# Altium PCB bala.PcbDoc
Units mil, origin at the board's own origin, x right, y up, seen from the top; angles counter-clockwise.
Board outline 3950 x 3150 mil, 2 copper layers (Top Layer, Bottom Layer); 18 components, 31 nets, 116 pads, 13 vias.
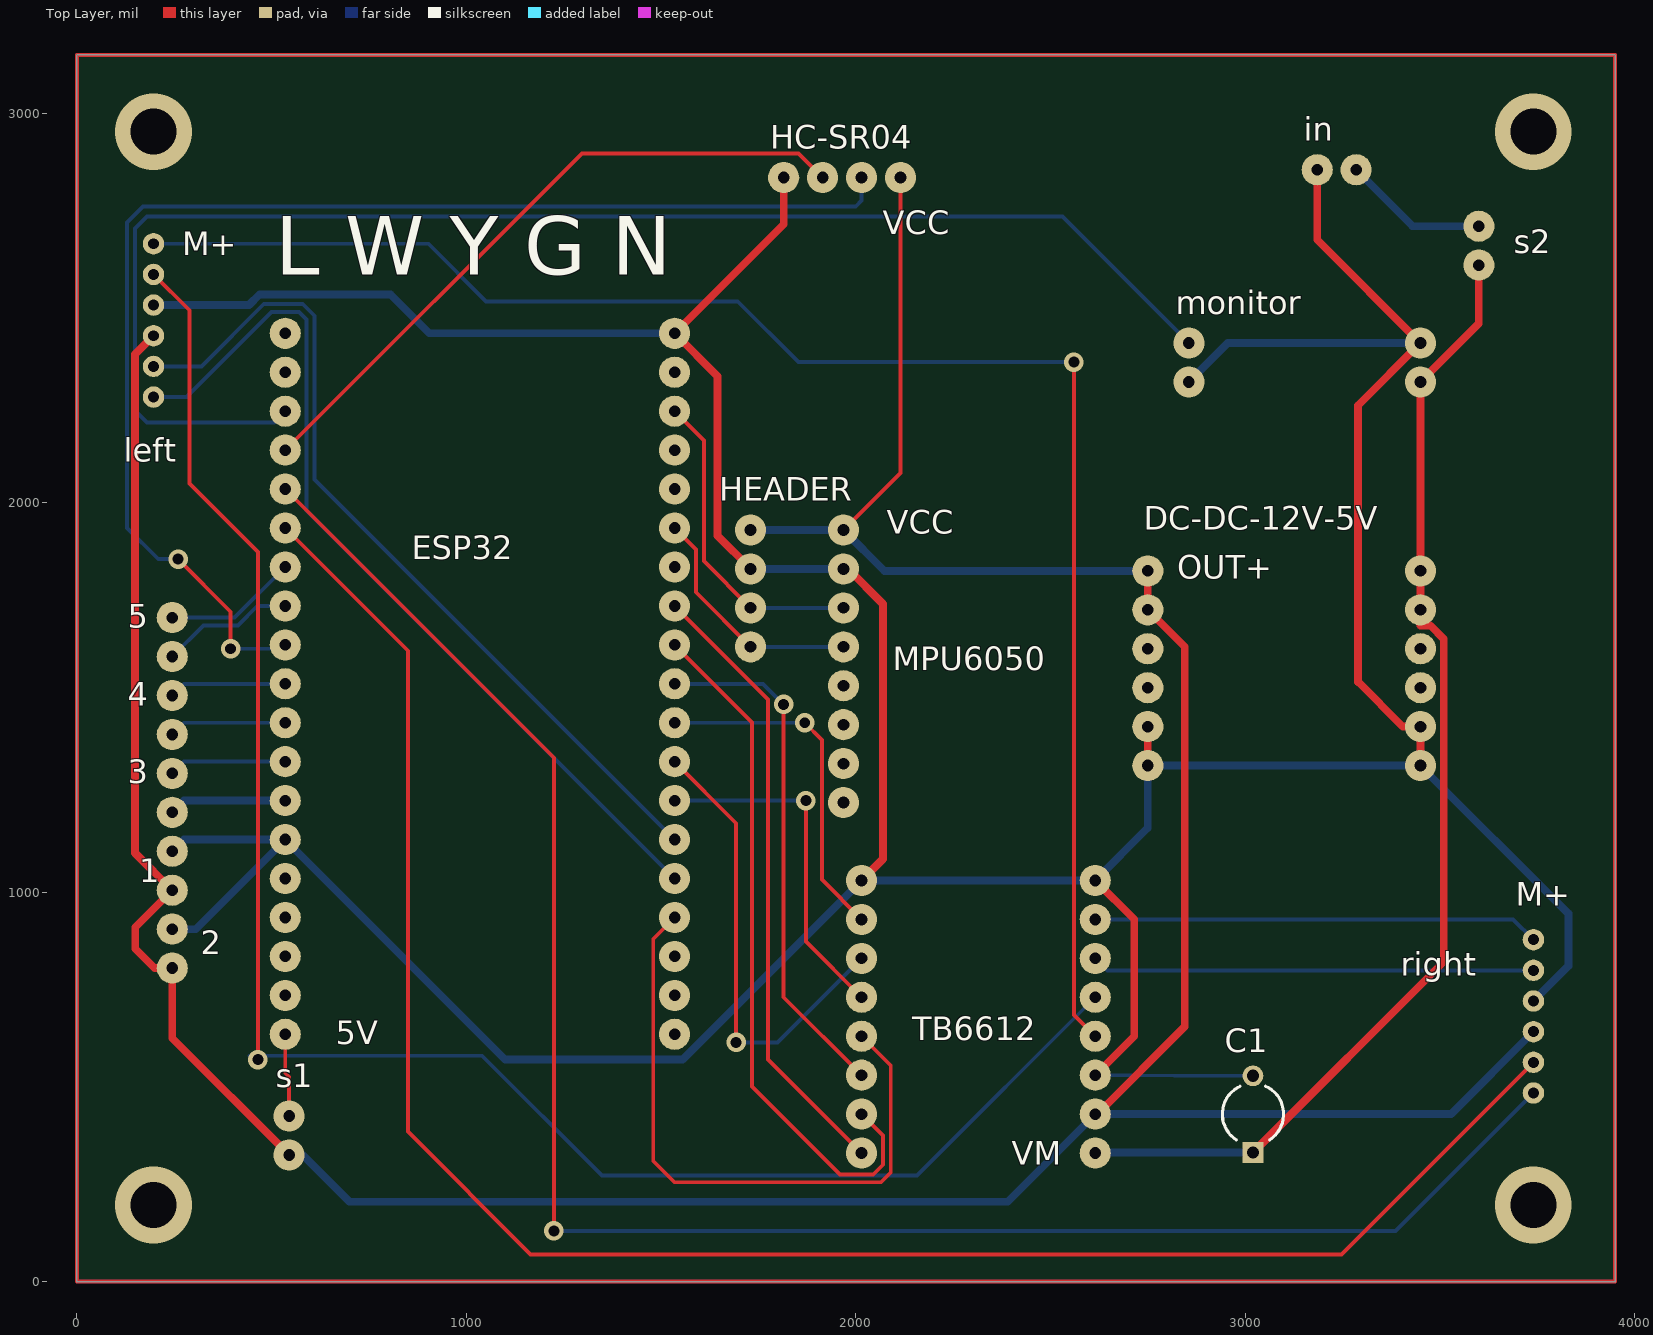
[diagram p0: Top Layer view]
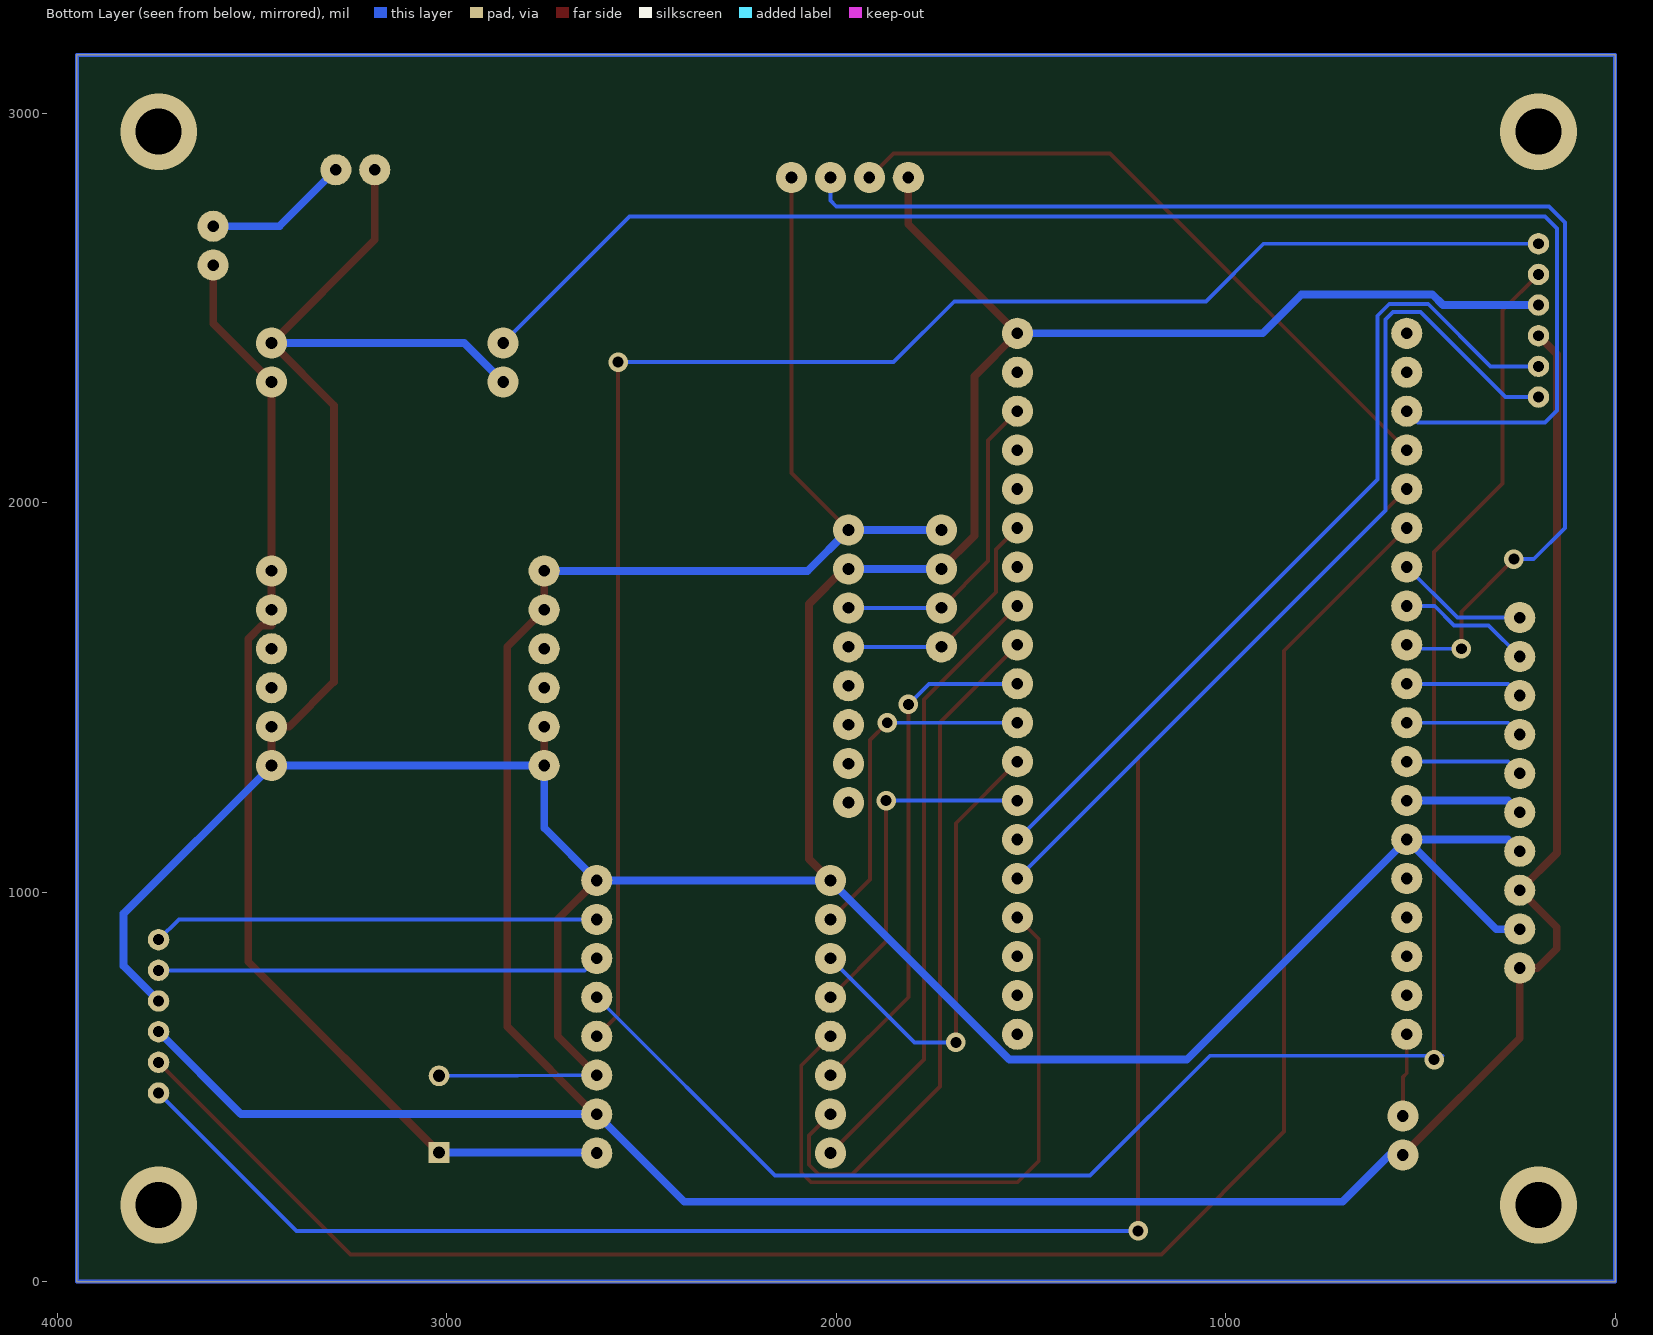
[diagram p1: Bottom Layer view, seen from below]

## Layer stack, top to bottom
Top Solder: solder mask 0.4, Solder Resist, Dk 3.5
Top Layer: signal copper 1.4
Dielectric 1: dielectric 12.6, FR-4, Dk 4.8
Bottom Layer: signal copper 1.4
Bottom Solder: solder mask 0.4, Solder Resist, Dk 3.5

## Board outline
0,0 0,3150 3950,3150 3950,0

## Design rules (kind name [scope] priority, off if disabled: settings)
Clearance [All] p1: gap=10 ignorepadtopadclearanceinfootprint=FALSE except(0: Arc-Hole Track-Hole SMDPad-Hole THPad-Hole Via-Hole Fill-Hole Poly-Hole Region-Hole Text-Hole)
PolygonConnect [All] p1: connectstyle=Relief reliefconductorwidth=10 reliefentries=4 polygonreliefangle="90 Angle" airgapwidth=10
RoomDefinition bala [InComponentClass('bala')] p1: confinementstyle=ConfineIn formatcopy=TRUE lockcomponents=FALSE outline 0,0 3950,0 3950,3150 0,3150
RoutingVias [All] p1: holewidth=28 width=50 viastyle="Through Hole" minholewidth=28 minwidth=50 maxholewidth=28 maxwidth=50
SolderMaskExpansion [All] p1: expansion=4
Width [All] p1: maxlimit=20 minlimit=10 preferedwidth=10 minimp=50.000000 maximp=50.000000 favimp=50.000000
30 further rules are at their usual default settings.

## Components (designator, comment, footprint, x,y, rotation, side; value= is the part's Value field where it differs from the comment)
1 "5V/GND" PCBComponent_1#1 245,1505 r180 top
2 "5V/GND" PCBComponent_1#1 245,1305 r180 top
3 "IO14/12" PCBComponent_1#1 245,1705 r180 top
4 "IO26/27" PCBComponent_1#1 245,1905 r180 top
5 "IO32/33" PCBComponent_1#1 245,2105 r180 top
C1 "" CAPR5-4X5 3020,430 r90 top value=220uF
DC-DC-12V-5V "DC-DC-12V-5V" PCBComponent_1#2 2920,1025 r0 top
ESP32 "ESP32" MPU6050 175,2570 r270 top
HC-SR04 "HC-SR04" PCBComponent_1#3 1900,2605 r0 top
HEADER "header4" PCBComponent_1#3 1500,1845 r270 top
in "12V" PCBComponent_1#1 2785,2855 r270 top
left "encoder" PCBComponent_1#4 196.85,2665 r180 top
monitor "电压检测" PCBComponent_1#5 3450,2410 r180 top (schematic designator 电压检测)
MPU6050 "MPU6050" PCBComponent_1#6 1913.5,1195 r0 top
right "encoder" PCBComponent_1#7 3740.16,984.25 r180 top
s1 "header1" PCBComponent_1#1 545,825 r180 top
s2 "header2" PCBComponent_1#1 3600,2210 r0 top
TB6612 "TB6612" PCBComponent_1#8 2085,940 r180 top

## Footprints (in the part's own frame and the unit in brackets; to place one, negate y for a bottom-side part, rotate by r counter-clockwise, add the part's x,y. Pads: shape width x height; smd on the part's side, far side on the other; paste and mask are expansions set on the pad)
CAPR5-4X5 [mm] "Capacitor; 2 Leads"
  rect 1.35x1.35 hole 0.8: 1(-2.5,0)
  round 1.35 hole 0.8: 2(2.5,0)
  silkscreen extent -1.69,-2 1.82,2
MPU6050 [mil]
  round 80 hole 30: 1(135,360) 2(235,360) 3(335,360) 4(435,360) 5(535,360) 6(635,360) 7(735,360) 8(835,360) 9(935,360) 10(1035,360) 11(1135,360) 12(1235,360) 13(1335,360) 14(1435,360) 15(1535,360) 16(1635,360) 17(1735,360) 18(1835,360) 19(1935,360) 20(1935,1360) 21(1835,1360) 22(1735,1360) 23(1635,1360) 24(1535,1360) 25(1435,1360) 26(1335,1360) 27(1235,1360) 28(1135,1360) 29(1035,1360) 30(935,1360) 31(835,1360) 32(735,1360) 33(635,1360) 34(535,1360) 35(435,1360) 36(335,1360) 37(235,1360) 38(135,1360)
PCBComponent_1#1 [mil]
  round 80 hole 30: 1(0,500) 2(0,400)
PCBComponent_1#2 [mil]
  round 80 hole 30: 0(-170,500) 0(-170,600) 0(530,500) 0(530,600) 1(-170,800) 2(-170,700) 3(-170,400) 4(-170,300) 5(530,300) 6(530,400) 7(530,700) 8(530,800)
PCBComponent_1#3 [mil]
  round 80 hole 30: 1(-85,230) 2(15,230) 3(115,230) 4(215,230)
PCBComponent_1#4 [mil]
  round 55 hole 28: 1(0,393.7) 2(0,314.96) 3(0,236.22) 4(0,157.48) 5(0,78.74) 6(0,0)
PCBComponent_1#5 [mil]
  round 80 hole 30: 1(0,100) 2(0,0) 3(594.49,0) 4(594.49,100)
PCBComponent_1#6 [mil]
  round 80 hole 30: 1(55,735) 2(55,635) 3(55,535) 4(55,435) 5(55,335) 6(55,235) 7(55,135) 8(55,35)
PCBComponent_1#7 [mil]
  round 55 hole 28: 1(0,500) 2(0,421.26) 3(0,342.52) 4(0,263.78) 5(0,185.04) 6(0,106.3)
PCBComponent_1#8 [mil]
  round 80 hole 30: 1(-530,610) 2(-530,510) 3(-530,410) 4(-530,310) 5(-530,210) 6(-530,110) 7(-530,10) 8(-530,-90) 9(70,-90) 10(70,10) 11(70,110) 12(70,210) 13(70,310) 14(70,410) 15(70,510) 16(70,610)

## Part data
1 2 3 4 5 DC-DC-12V-5V ESP32 HC-SR04 HEADER in left monitor MPU6050 right s1 s2 TB6612: library part Component_1
C1: library part Cap2, "Capacitor", PackageDescription="Capacitor; 2 Leads", PackageReference=CAPR5-4X5, Published=23-Sep-2002, Publisher="Altium Limited"

## Via types
v1: diameter 50, hole 28, Top Layer to Bottom Layer, 9 vias
v2: diameter 196.85, hole 118.11, Top Layer to Bottom Layer, 4 vias

## Nets (pads, with @x,y where several pads share a name; then routed paths per layer and width w, separated by ;. In a path a pad name is that pad's centre, name@x,y a point inside that pad or via, vN(x,y) a via of type N, cw(c..) or ccw(c..) an arc to the next point about the centre after c; other vN are vias at no path point)
GND: 1.2 2.2 C1.2 DC-DC-12V-5V.3 DC-DC-12V-5V.4 DC-DC-12V-5V.5 DC-DC-12V-5V.6 ESP32.14 ESP32.38 HC-SR04.1 HEADER.2 in.2 left.4 monitor.2 monitor.4 MPU6050.2 right.4 TB6612.3 TB6612.8 TB6612.9 | length 12267.5
  Top Layer w20: HEADER.2 1645,1915 1645,2325 ESP32.38 1815,2715 HC-SR04.1 ; MPU6050.2 1980,1830 2070,1740 2070,1085 TB6612.9 ; TB6612.3 2715,630 2715,930 TB6612.8 ; DC-DC-12V-5V.4 DC-DC-12V-5V.3 ; in.2 3185,2675 monitor.2 3290,2250 3290,1540 3405,1425 DC-DC-12V-5V.6 DC-DC-12V-5V.5
  Bottom Layer w10: TB6612.3 2818.57,528.43 C1.2
  Bottom Layer w20: left.4 442.16,2507.52 469.64,2535 805,2535 905,2435 ESP32.38 ; 2.2 305,905 ESP32.14 ; 1.2 275,1135 ESP32.14 ; HEADER.2 MPU6050.2 ; monitor.4 2955.51,2410 monitor.2 ; right.4 3830,810.31 3830,945 DC-DC-12V-5V.5 DC-DC-12V-5V.4 2750,1165 TB6612.8 TB6612.9 1555,570 1100,570 ESP32.14
Net1_1: 1.1 2.1 DC-DC-12V-5V.1 DC-DC-12V-5V.2 HC-SR04.4 HEADER.1 left.3 MPU6050.1 right.3 s1.1 TB6612.2 | length 9379.9
  Top Layer w10: MPU6050.1 2115,2076.5 HC-SR04.4 ; DC-DC-12V-5V.2 DC-DC-12V-5V.2@2750,1735
  Top Layer w20: left.3 149.35,2381.28 149.35,1100.65 1.1 150,910 150,855 200,805 2.1 245,625 s1.1 ; TB6612.2 2620,430 2845,655 2845,1630 DC-DC-12V-5V.2 ; DC-DC-12V-5V.2@2750,1735 DC-DC-12V-5V.1
  Bottom Layer w20: s1.1 580,325 700,205 2390,205 TB6612.2 3528.43,430 right.3 ; HEADER.1 MPU6050.1 2073.5,1825 DC-DC-12V-5V.1
Net3_1: 3.1 ESP32.13 | length 302.4
  Bottom Layer w20: 3.1 275,1235 ESP32.13
Net3_2: 3.2 ESP32.12 | length 302.4
  Bottom Layer w10: 3.2 275,1335 ESP32.12
Net4_1: 4.1 ESP32.11 | length 302.4
  Bottom Layer w10: 4.1 275,1435 ESP32.11
Net4_2: 4.2 ESP32.10 | length 302.4
  Bottom Layer w10: 4.2 275,1535 ESP32.10
Net5_1: 5.1 ESP32.8 | length 343.8
  Bottom Layer w10: 5.1 325,1685 413.28,1685 463.28,1735 ESP32.8
Net5_2: 5.2 ESP32.7 | length 343.8
  Bottom Layer w10: 5.2 405,1705 ESP32.7
NetC1_1: C1.1 DC-DC-12V-5V.7 DC-DC-12V-5V.8 monitor.1 s2.2 TB6612.1 | length 2988.6
  Top Layer w20: C1.1 3510,821.57 3510,1649.85 3474.85,1685 3450,1685 DC-DC-12V-5V.7 DC-DC-12V-5V.8 monitor.1 3600,2460 s2.2
  Bottom Layer w20: TB6612.1 2616.57,331.57 C1.1
NetESP32_3: ESP32.3 monitor.3 | length 3731.8
  Bottom Layer w10: ESP32.3 506,2206 180,2206 149,2237 149,2704 180,2735 2530.51,2735 monitor.3
NetESP32_4: ESP32.4 HC-SR04.2 | length 1721.3
  Top Layer w10: ESP32.4 1297,2897 1853,2897 HC-SR04.2
NetESP32_5: ESP32.5 right.1 | length 4852.7
  Top Layer w10: ESP32.5 1225,1345 v1(1225,130)
  Bottom Layer w10: v1(1225,130) 3385.91,130 right.1
NetESP32_6: ESP32.6 right.2 | length 4905.3
  Top Layer w10: ESP32.6 850,1620 850,385 1165,70 3247.17,70 right.2
NetESP32_9: ESP32.9 HC-SR04.3 | length 3347.4
  Top Layer w10: v1(260,1855) 395,1720 v1(395,1625)
  Bottom Layer w10: v1(260,1855) 209,1855 129,1935 129,2720 170,2761 2000,2761 2015,2776 HC-SR04.3 ; v1(395,1625) 525,1625 ESP32.9
NetESP32_19: ESP32.19 s1.2 | length 214.1
  Top Layer w10: ESP32.19 535,535 545,525 s1.2
NetESP32_23: ESP32.23 TB6612.13 | length 1672
  Top Layer w10: ESP32.23 1480,880 1480,310 1535,255 2065,255 2090,280 2090,555 TB6612.13
NetESP32_24: ESP32.24 left.1 | length 2318.5
  Bottom Layer w10: left.1 281.3,2271.3 500,2490 570,2490 590,2470 590,1980 ESP32.24
NetESP32_25: ESP32.25 left.2 | length 2220
  Bottom Layer w10: left.2 320.04,2350.04 480,2510 580,2510 610,2480 610,2060 ESP32.25
NetESP32_26: ESP32.26 TB6612.12 | length 901.2
  Top Layer w10: v1(1872,1235) 1872,873 TB6612.12
  Bottom Layer w10: ESP32.26 v1(1872,1235)
NetESP32_27: ESP32.27 TB6612.11 | length 1197.9
  Top Layer w10: ESP32.27 1693,1177 v1(1693,614)
  Bottom Layer w10: v1(1693,614) 1799,614 TB6612.11
NetESP32_28: ESP32.28 TB6612.10 | length 899.5
  Top Layer w10: v1(1869,1435) 1913,1391 1913,1032 TB6612.10
  Bottom Layer w10: ESP32.28 v1(1869,1435)
NetESP32_29: ESP32.29 TB6612.14 | length 1336.8
  Top Layer w10: v1(1815,1482) 1815,730 TB6612.14
  Bottom Layer w10: ESP32.29 1762,1535 v1(1815,1482)
NetESP32_30: ESP32.30 TB6612.15 | length 1809.2
  Top Layer w10: ESP32.30 1734,1436 1734,501 1960,275 2045,275 2070,300 2070,375 TB6612.15
NetESP32_31: ESP32.31 TB6612.16 | length 1603.8
  Top Layer w10: ESP32.31 1775,1495 1775,570 TB6612.16
NetESP32_33: ESP32.33 HEADER.4 MPU6050.4 | length 624.3
  Top Layer w10: ESP32.33 1590,1880 1590,1770 HEADER.4
  Bottom Layer w10: HEADER.4 MPU6050.4
NetESP32_36: ESP32.36 HEADER.3 MPU6050.3 | length 824.3
  Top Layer w10: ESP32.36 1610,2160 1610,1850 HEADER.3
  Bottom Layer w10: HEADER.3 MPU6050.3
Netin_1: in.1 s2.1 | length 375.1
  Bottom Layer w20: in.1 3430,2710 s2.1
Netleft_5: left.5 TB6612.5 | length 4642.8
  Top Layer w10: left.5 289,2494.11 289,2049 465,1873 v1(465,570)
  Bottom Layer w10: v1(465,570) 453,570 443,580 1040,580 1348,272 2157,272 TB6612.5
Netleft_6: left.6 TB6612.4 | length 4242.9
  Top Layer w10: v1(2560,2361) 2560,685 TB6612.4
  Bottom Layer w10: left.6 903,2665 1051,2517 1697,2517 1853,2361 v1(2560,2361)
Netright_5: right.5 TB6612.6 | length 1137.9
  Bottom Layer w10: TB6612.6 2645.79,799.21 right.5
Netright_6: right.6 TB6612.7 | length 1146.7
  Bottom Layer w10: TB6612.7 3688.11,930 right.6
pads on no net: DC-DC-12V-5V.0 ESP32.1 ESP32.2 ESP32.15 ESP32.16 ESP32.17 ESP32.18 ESP32.20 ESP32.21 ESP32.22 ESP32.32 ESP32.34 ESP32.35 ESP32.37 MPU6050.5 MPU6050.6 MPU6050.7 MPU6050.8
copper on no net:
  other v2: 196.85,196.85 3740.16,196.85 196.85,2952.76 3740.16,2952.76

## Other copper
Multi-Layer:
  the board outline again, w10

## Silkscreen, mask and mechanical layers (free items; w line width, h text height)
Top Overlay:
  text "VCC" at 2070,2690 h60
  text "M+" at 270,2635 h60
  text "L W Y G N" at 510,2585 h150
  text "VCC" at 2080,1920 h60
  text "OUT+" at 2825,1805 h60
  text "M+" at 3695,965 h60
  text "5V" at 665,610 h60
  text "VM" at 2400,300 h60